# Altium PCB PCB1-IECA-01-21.PcbDoc
Units mm, origin at the board's own origin, x right, y up, seen from the top; angles counter-clockwise.
Board outline 60 x 30 mm, 2 copper layers (Top Layer, Bottom Layer), stack 1.554 mm thick; 23 components, 11 nets, 55 pads, 8 vias.
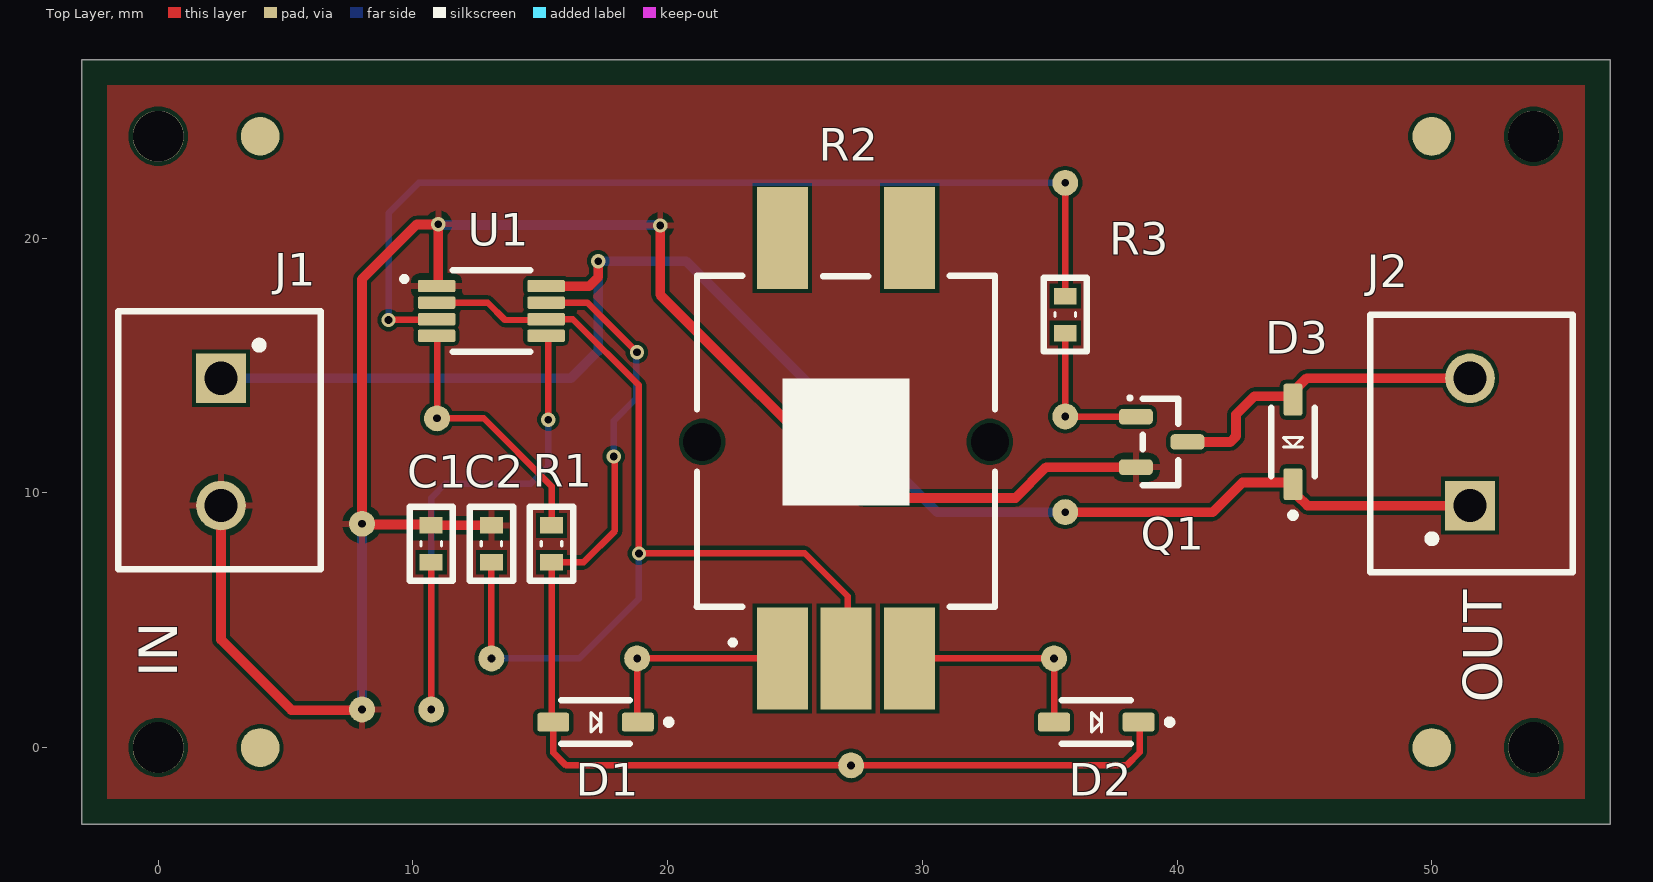
[diagram p0: Top Layer view]
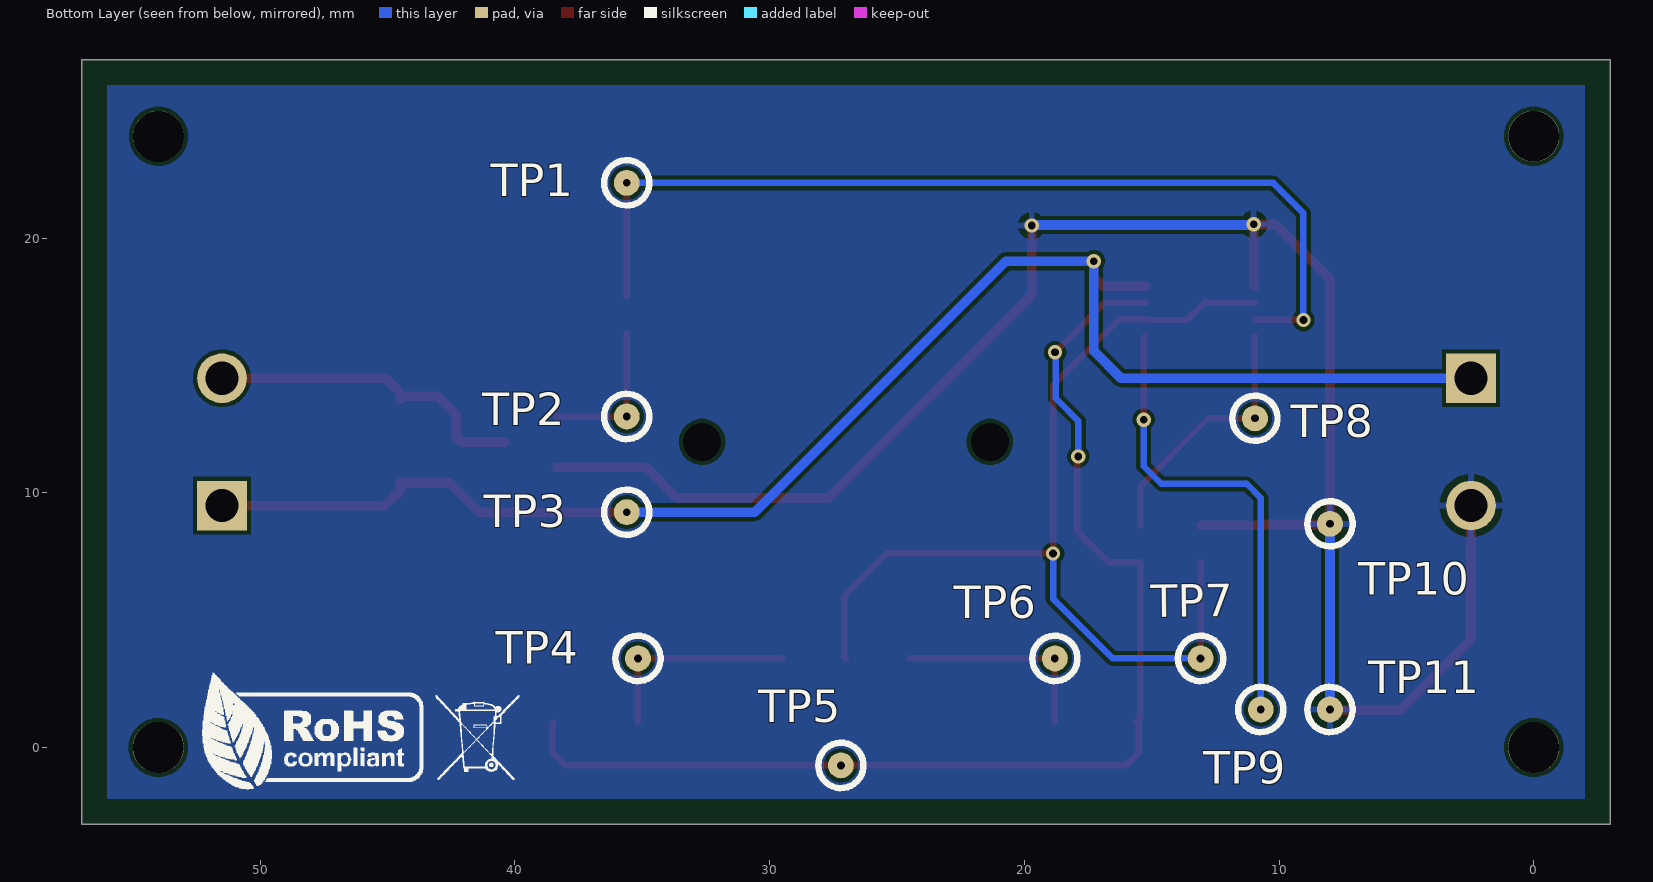
[diagram p1: Bottom Layer view, seen from below]
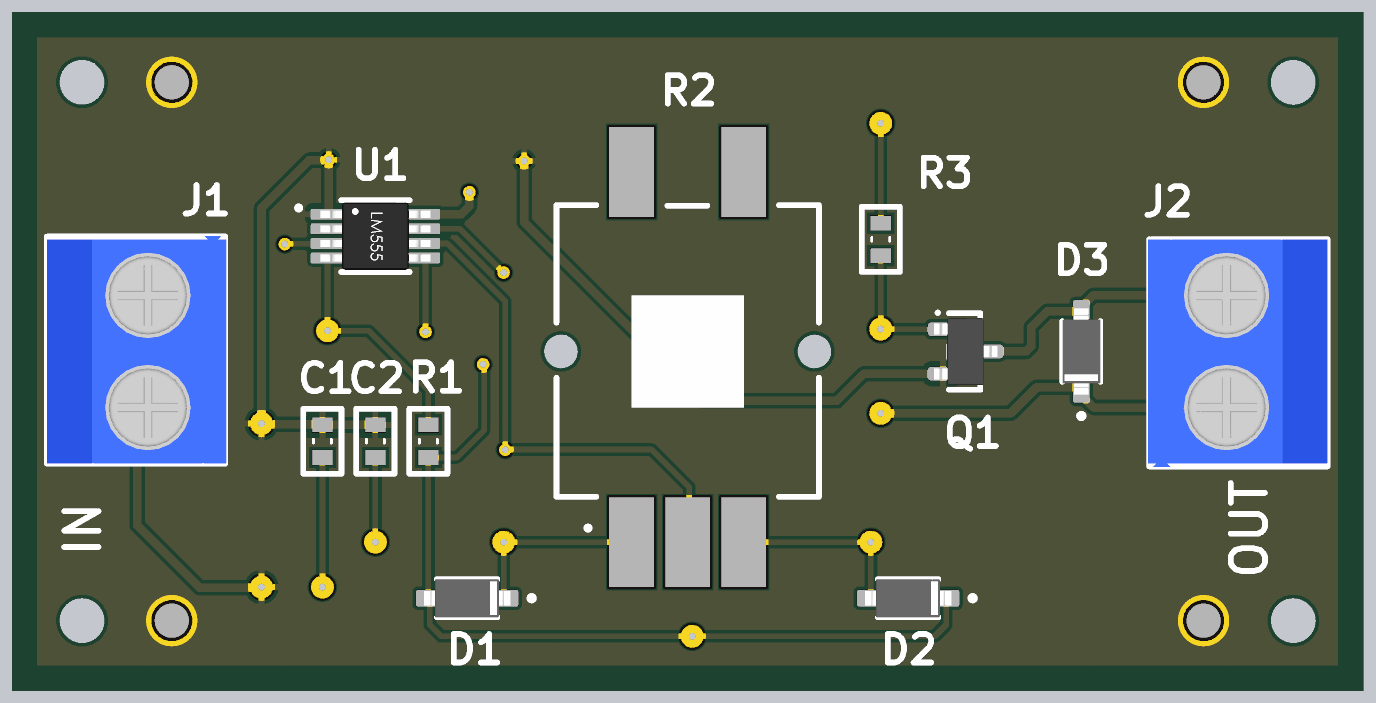
[diagram p2: 3D render of the assembled board from above, using the file's embedded part models]

## Layer stack, top to bottom
Top Solder: solder mask 0.0102, Solder Resist, Dk 3.5
Top Layer: signal copper 0.0356
Dielectric 1: dielectric 1.4834, FR-4, Dk 4.8
Bottom Layer: signal copper 0.0356
Bottom Solder: solder mask 0.0102, Solder Resist, Dk 3.5

## Board outline
-3,-3 -3,27 57,27 57,-3

## Design rules (kind name [scope] priority, off if disabled: settings)
Clearance [All] p1: gap=0.152 ignorepadtopadclearanceinfootprint=FALSE
HoleSize [All] p1: absolutevalues=TRUE maxlimit=2.54 minlimit=0.305 maxpercent=80.000 minpercent=20.000
MinimumSolderMaskSliver [All] p1: minsoldermaskwidth=0.152
PolygonConnect [All] p1: connectstyle=Relief reliefconductorwidth=0.254 reliefentries=4 polygonreliefangle="90 Angle" airgapwidth=0.254
RoutingVias [All] p1: holewidth=0.305 width=0.559 viastyle="Through Hole" minholewidth=0.305 minwidth=0.559 maxholewidth=0.61 maxwidth=0.864
SolderMaskExpansion [All] p1: expansion=0.102 istentingtop=FALSE
Width Width_POWER [InNetClass('POWER')] p1: maxlimit=0.508 minlimit=0.254 preferedwidth=0.381
Width [All] p2: maxlimit=0.305 minlimit=0.152 preferedwidth=0.254
28 further rules are at their usual default settings.

## Classes and differential pairs
net class POWER: GND NetD1_A VCC
component class Sheet1-IECA-01-21: C2 D2 D3 J1 J2 Q1 R1 R2 TP1 TP2 TP3 TP6 TP7 TP10 TP11 U1

## Components (designator, comment, footprint, x,y, rotation, side; value= is the part's Value field where it differs from the comment)
C1 "10000 pF" CAP0603_C0603C103K3HACTU 10.716,8 r90 top (schematic designator C2)
C2 "0.1 µF" CAP0603_C0603C104K3RAC7081 13.078,8 r90 top (schematic designator C1)
D1 "SD103CW-FDIDKR-ND" SD103CW-13-F 17.168,1 r180 top (schematic designator D2)
D2 "SD103CW-FDIDKR-ND" SD103CW-13-F 36.827,1 r180 top (schematic designator D3)
D3 "SD103CW-FDIDKR-ND" SD103CW-13-F 44.549,12 r90 top (schematic designator D1)
J1 "277-1667-ND" TB_2PIN_1935161 2.461,14.5 r270 top
J2 "277-1667-ND" TB_2PIN_1935161 51.5,9.5 r90 top
Q1 "833-MMSS8050-L-TP" SOT23-MMSS8050-L-TP 39.393,12 r0 top
R1 "1 kOhms" RES0603_ERJU03F1001V 15.44,8 r90 top
R2 "50 kΩ" PRS11S-N20F-503B1 27,12 r0 top (schematic designator R3)
R3 "47 Ohms" RES0603_ERJU03F47R0V 35.608,17 r270 top (schematic designator R2)
TP1 "TP" TP 35.608,22.171 r90 bottom (schematic designator TP6)
TP2 "TP" TP 35.608,13 r90 bottom (schematic designator TP7)
TP3 "TP" TP 35.608,9.243 r90 bottom (schematic designator TP2)
TP4 "TP" TP 35.167,3.5 r90 bottom (schematic designator TP5)
TP5 "TP" TP 27.201,-0.7 r90 bottom (schematic designator TP3)
TP6 "TP" TP 18.8,3.5 r90 bottom (schematic designator TP4)
TP7 "TP" TP 13.078,3.5 r90 bottom (schematic designator TP9)
TP8 "TP" TP 10.945,12.926 r90 bottom (schematic designator TP1)
TP9 "TP" TP 10.716,1.495 r90 bottom (schematic designator TP8)
TP10 "TP" TP 8,8.786 r90 bottom
TP11 "TP" TP 8,1.496 r90 bottom
U1 "LM555CMM/NOPBCT-ND" LM555SOP65P490X110-8N 13.078,17.142 r0 top

## Footprints (in the part's own frame and the unit in brackets; to place one, negate y for a bottom-side part, rotate by r counter-clockwise, add the part's x,y. Pads: shape width x height; smd on the part's side, far side on the other; paste and mask are expansions set on the pad)
CAP0603_C0603C103K3HACTU [mm] "CAP CER 10000PF 25V X8R 0603"
  rect 0.65x0.902 smd mask+0.025: 1(-0.725,0) 2(0.725,0)
  silkscreen extent -1.45,-0.85 1.45,0.85, body extent -0.8,-0.4 0.8,0.4, height 0.8
CAP0603_C0603C104K3RAC7081 [mm] "CAP CER 0.1UF 25V X7R 0603"
  rect 0.65x0.902 smd mask+0.025: 1(-0.725,0) 2(0.725,0)
  silkscreen extent -1.45,-0.85 1.45,0.85, body extent -0.8,-0.4 0.8,0.4, height 0.8
LM555SOP65P490X110-8N [mm] "IC OSC SGL TIMER 100KHZ 8VSSOP"
  rrect25% 1.47x0.48 smd mask+0.004: 1(-2.15,0.975) 2(-2.15,0.325) 3(-2.15,-0.325) 4(-2.15,-0.975) 5(2.15,-0.975) 6(2.15,-0.325) 7(2.15,0.325) 8(2.15,0.975)
  silkscreen extent -3.52,-1.6 1.53,1.6, body extent -2.45,-1.5 2.45,1.5, height 1.08
PRS11S-N20F-503B1 [mm] "POT 50K OHM 1/20W CARBON LINEAR"
  rect 2x4 smd mask+0.102: 1(-2.5,-8.5) 2(0,-8.5) 3(2.5,-8.5) 4(-2.5,8) 5(2.5,8)
  round 0 hole 1.5 unplated: S1(-5.65,0) S2(5.65,0)
  silkscreen extent -5.85,-7.97 5.85,6.53, body extent -5.85,-9.53 5.85,8.98, height 20.03
RES0603_ERJU03F47R0V [mm] "RES 47 OHM 1% 1/10W 0603 SMD"
  rect 0.65x0.902 smd mask+0.025: 1(-0.725,0) 2(0.725,0)
  silkscreen extent -1.45,-0.85 1.45,0.85, body extent -0.8,-0.4 0.8,0.4, height 0.46
RES0603_ERJU03F1001V [mm] "RES 1K OHM 1% 1/10W 0603 SMD"
  rect 0.65x0.902 smd mask+0.025: 1(-0.725,0) 2(0.725,0)
  silkscreen extent -1.45,-0.85 1.45,0.85, body extent -0.8,-0.4 0.8,0.4, height 0.46
SD103CW-13-F [mm] "DIODE SCHOTTKY 20V 350MA SOD123"
  rrect25% 1.25x0.74 smd mask+0.025: A(1.66,0) C(-1.66,0)
  silkscreen extent -2.97,-0.85 1.35,0.85, body extent -1.92,-0.85 1.92,0.85, height 1.36
SOT23-MMSS8050-L-TP [mil] "TRANS NPN 25V 1.5A SOT-23"
  rrect50% 52.5x24.02 smd mask+1: 1(-39.89,39) 2(-39.89,-39) 3(39.89,0)
  silkscreen extent -52,-67 26,71, body extent -56,-59 56,59, height 46
TB_2PIN_1935161 [mm] "TERM BLK 2POS SIDE ENTRY 5MM PCB"
  rect 1.95x1.95 hole 1.3: 1(0,0)
  round 1.95 hole 1.3: 2(5,0)
  silkscreen extent -2.63,-4.03 7.5,3.93, body extent -2.65,-4.03 7.5,3.97, height 10
TP [mil]
  round 40 hole 12 mask+4: 1(0,0)
  silkscreen extent -35,-35 35,35

## Part data
C1: library part C0603C103K3HAC7867, "10000 pF ±10% 25V Ceramic Capacitor X8R 0603 (1608 Metric).", Manufacturer=KEMET, Operating Temperature="-55°C ~ 150°C", Package / Case="0603 (1608 Metric)", Supplier Part Number 1=399-C0603C103K3HAC7867CT-ND, Temperature Coefficient=X8R, Tolerance=±10%, Voltage - Rated=25V, Applications="General Purpose", Base Product Number=C0603C, Capacitance="10000 pF", Category="Capacitors Ceramic Capacitors", Mounting Type="Surface Mount, MLCC", Series="SMD Comm X8R HT150C", Size / Dimension="0.063\" L x 0.031\" W (1.60mm x 0.80mm)", Supplier 1=Digi-Key, Thickness (Max)="0.034\" (0.87mm)"
C2: library part C0603C104K3RAC7081, "0.1 µF ±10% 25V Ceramic Capacitor X7R 0603 (1608 Metric).", Manufacturer=KEMET, Operating Temperature="-55°C ~ 125°C", Package / Case="0603 (1608 Metric)", Supplier Part Number 1=399-C0603C104K3RAC7081CT-ND, Temperature Coefficient=X7R, Tolerance=±10%, Voltage - Rated=25V, Applications="Bypass, Decoupling", Base Product Number=C0603C, Capacitance="0.1 µF", Category="Capacitors Ceramic Capacitors", Mounting Type="Surface Mount, MLCC", Series="SMD Comm X7R", Size / Dimension="0.063\" L x 0.031\" W (1.60mm x 0.80mm)", Supplier 1=Digi-Key, Thickness (Max)="0.037\" (0.95mm)"
D1 D2 D3: library part SD103CW-13-F, "Diode Schottky 20 V 350mA (DC) Surface Mount SOD-123.", Capacitance @ Vr, F="28pF @ 0V, 1MHz", Current - Average Rectified (Io)="350mA (DC)", Current - Reverse Leakage @ Vr="5 µA @ 10 V", Manufacturer="Diodes Incorporated", Operating Temperature - Junction="-65°C ~ 125°C", Package / Case=SOD-123, Voltage - DC Reverse (Vr) (Max)="20 V", Voltage - Forward (Vf) (Max) @ If="600 mV @ 200 mA", Category="Discrete Semiconductor Products Diodes - Rectifiers - Single", Diode Type=Schottky, Mounting Type="Surface Mount", Reverse Recovery Time (trr)="10 ns", Speed="Fast Recovery =< 500ns, > 200mA (Io)", Supplier 1=Digi-Key, Supplier Part Number 1=SD103CW-FDIDKR-ND
J1 J2: library part 1935161, "2 Position Wire to Board Terminal Block Horizontal with Board 0.197\" (5.00mm) Through Hole.", Current="18 A", Manufacturer="Phoenix Contact", Voltage="300 V", Category="Connectors, Interconnects", Contact Material=Plating, Housing Material="Polyamide (PA), Nylon", Mating Orientation="Horizontal with Board", Mounting Type="Through Hole", Pitch="0.197\" (5.00mm)", Series="COMBICON PT", Supplier 1=Digi-Key, Supplier Part Number 1=277-1667-ND, Wire Gauge="12-26 AWG"
Q1: library part MMSS8050-L-TP, "Bipolar (BJT) Transistor NPN 25 V 1.5 A 100MHz 625 mW Surface Mount SOT-23.", Current - Collector (Ic) (Max)="1.5 A", Current - Collector Cutoff (Max)=100nA, DC Current Gain (hFE) (Min) @ Ic, Vce="120 @ 100mA, 1V", Frequency - Transition=100MHz, Manufacturer="Micro Commercial Co", Operating Temperature="-55°C ~ 150°C (TJ)", Package / Case="TO-236-3, SC-59, SOT-23-3", Power - Max="625 mW", Voltage - Collector Emitter Breakdown (Max)="25 V", Base Product Number=MMSS8050, Category="Discrete Semiconductor Products Transistors - Bipolar (BJT) - Single", Supplier 1=Mouser, Supplier Part Number 1=833-MMSS8050-L-TP, Transistor Type=NPN, Vce Saturation (Max) @ Ib, Ic="500mV @ 80mA, 800mA"
R1: library part ERJU03F1001V, "1 kOhms ±1% 0.1W, 1/10W Chip Resistor 0603 (1608 Metric) Anti-Sulfur, Automotive AEC-Q200 Thick Film.", Manufacturer="Panasonic Electronic Components", Operating Temperature="-55°C ~ 155°C", Package / Case="0603 (1608 Metric)", Power (Watts)="0.1W, 1/10W", Supplier Part Number 1=10-ERJ-U03F1001VCT-ND, Temperature Coefficient=±100ppm/°C, Tolerance=±1%, Base Product Number=ERJ-U03, Category="Resistors Chip Resistor - Surface Mount", ComponentLink1Description=https://www.digikey.com.mx/en/products/detail/panasonic-electronic-components/ERJ-U03F1001V/11641677?utm_source=snapeda&utm_medium=aggregator&utm_campaign=buynow, Composition="Thick Film", Features="Anti-Sulfur, Automotive AEC-Q200", Height - Seated (Max)="0.022\" (0.55mm)", Resistance="1 kOhms", Series=ERJ-U03, Size / Dimension="0.063\" L x 0.031\" W (1.60mm x 0.80mm)", Supplier 1=Digi-Key
R2: library part PRS11S-N20F-503B1, "50k Ohm 1 Gang Linear Surface Mount Potentiometer None 1.0 Kierros Carbon 0.05W, 1/20W Gull Wing.", Manufacturer="Bourns Inc.", Power (Watts)="0.05W, 1/20W", Resistive Material=Carbon, Supplier Part Number 1=PRS11S-N20F-503B1-ND, Tolerance=±20%, Actuator Diameter="0.236\" (6.00mm)", Actuator Length="0.787\" (20.00mm)", Actuator Type=Flatted, Adjustment Type="Top Adjustment", Base Product Number=PRS11S, Category="Potentiometers, Variable Resistors Rotary Potentiometers, Rheostats", Mounting Type="Surface Mount", Resistance="50 kΩ", Rotation=300°, Series="Pro Audio PRS11S", Size - Body="Rectangular - 0.512\" x 0.461\" Face x 0.283\" H (13.00mm x 11.70mm x 7.20mm)", Supplier 1=Digi-Key, Taper=Linear, Termination Style="Gull Wing"
R3: library part ERJ-U03F47R0V, "47 Ohms ±1% 0.1W, 1/10W Chip Resistor 0603 (1608 Metric) Anti-Sulfur, Automotive AEC-Q200 Thick Film.", Manufacturer="Panasonic Electronic Components", Operating Temperature="-55°C ~ 155°C", Package / Case="0603 (1608 Metric)", Power (Watts)="0.1W, 1/10W", Supplier Part Number 1=10-ERJ-U03F47R0VCT-ND, Temperature Coefficient=±100ppm/°C, Tolerance=±1%, Base Product Number=ERJ-S03, Category="Resistors Chip Resistor - Surface Mount", Composition="Thick Film", Features="Anti-Sulfur, Automotive AEC-Q200", Height - Seated (Max)="0.022\" (0.55mm)", Resistance="47 Ohms", Series=ERJ-S03, Size / Dimension="0.063\" L x 0.031\" W (1.60mm x 0.80mm)", Supplier 1=Digi-Key
U1: library part LM555CMM/NOPB, "555 Type, Timer/Oscillator (Single) IC 100kHz 8-VSSOP.", Current - Supply="10 mA", Frequency=100kHz, Manufacturer="Texas Instruments", Operating Temperature="0°C ~ 70°C", Package / Case="8-TSSOP, 8-MSOP (0.118\", 3.00mm Width)", Voltage - Supply="4.5V ~ 16V", Base Product Number=LM555, Category="Integrated Circuits (ICs) Clock/Timing - Programmable Timers and Oscillators", Manufacturer Product Number=LM555CMM/NOPB, Mounting Type="Surface Mount", Supplier 1=Digi-Key, Supplier Part Number 1=LM555CMM/NOPBCT-ND, Type="555 Type, Timer/Oscillator (Single)"

## Free pads (board coordinates)
  round 1.524 smd mask+0.381: Fiducial(4,0) Fiducial(4,24) Fiducial(49.995,23.997) Fiducial(50,0)
  round 2 hole 2 unplated mask+0: ""(0,0) ""(0,24) ""(53.995,23.997) ""(54,0)

## Via types
v1: diameter 0.559, hole 0.305, Top Layer to Bottom Layer, 8 vias

## Nets (pads, with @x,y where several pads share a name; then routed paths per layer and width w, separated by ;. In a path a pad name is that pad's centre, name@x,y a point inside that pad or via, vN(x,y) a via of type N, cw(c..) or ccw(c..) an arc to the next point about the centre after c; other vN are vias at no path point)
GND: C1.2 C2.2 J1.2 Q1.2 TP10.1 TP11.1 U1.1 | length 74.2
  Top Layer w0.381: J1.2 2.461,4.239 5.23,1.47 7.975,1.47 TP11.1 ; U1.1 10.946,18.117 10.995,18.167 v1(10.995,20.546) 10.983,20.533 10.145,20.533 8,18.389 TP10.1 8.03,8.755 10.686,8.755 C1.2 C2.2 ; v1(19.708,20.495) 19.708,17.777 27.683,9.802 33.652,9.802 34.86,11.009 Q1.2
  Bottom Layer w0.381: TP11.1 TP10.1 ; v1(10.995,20.546) 11.021,20.52 19.682,20.52 v1(19.708,20.495)
NetC1_1: C2.1 R2.2 TP7.1 U1.2 U1.6 | length 39.6
  Top Layer w0.254: U1.2 12.931,17.467 13.612,16.787 15.197,16.787 U1.6 16.273,16.817 18.869,14.221 v1@18.869,7.63 ; TP7.1 C2.1 ; v1(18.869,7.617) v1@18.869,7.63 ; R2.2 27.074,3.574 27.074,5.941 25.385,7.63 v1@18.869,7.63
  Bottom Layer w0.254: TP7.1 16.53,3.5 18.869,5.839 v1(18.869,7.617)
NetC2_1: C1.1 TP9.1 U1.5 | length 24.4
  Top Layer w0.254: TP9.1 C1.1 ; U1.5 15.313,16.082 v1(15.313,12.875)
  Bottom Layer w0.254: TP9.1 10.716,9.802 11.271,10.357 14.624,10.357 15.313,11.046 v1(15.313,12.875)
NetD1_A: D3.A J2.2 Q1.3 | length 12.9
  Top Layer w0.381: Q1.3 42.09,12 42.314,12.223 42.314,13.078 43.025,13.789 44.371,13.789 44.5,13.66 44.5,13.915 45.085,14.5 J2.2
NetD2_A: D1.A D2.C R1.1 TP5.1 U1.7 | length 47
  Top Layer w0.254: U1.7 15.231,17.47 16.84,17.47 v1(18.793,15.517) ; D1.A 15.508,-0.197 16.01,-0.7 TP5.1 38.01,-0.7 38.529,-0.181 38.529,0.958 D2.C ; D1.A@15.609,1 15.44,1.169 R1.1 16.698,7.275 17.93,8.506 17.93,11.376 v1(17.879,11.427)
  Bottom Layer w0.254: v1(17.879,11.427) 17.879,12.824 18.768,13.713 18.768,15.491 v1(18.793,15.517)
NetD2_C: D1.C R2.1 TP6.1 | length 8.2
  Top Layer w0.254: D1.C 18.8,1.028 TP6.1 R2.1
NetD3_A: D2.A R2.3 TP4.1 | length 8.2
  Top Layer w0.254: R2.3 TP4.1 D2.A
NetQ1_1: Q1.1 R3.2 TP2.1 | length 6.1
  Top Layer w0.254: R3.2 TP2.1 35.613,12.995 38.375,12.995 Q1.1
NetR1_2: R1.2 TP8.1 U1.4 | length 10.3
  Top Layer w0.254: TP8.1 U1.4@10.944,16.151 ; TP8.1@10.966,12.926 12.773,12.926 15.44,10.259 R1.2
NetR2_1: R3.1 TP1.1 U1.3 | length 37.6
  Top Layer w0.254: v1(9.04,16.787) 9.055,16.802 10.913,16.802 U1.3 ; R3.1 TP1.1
  Bottom Layer w0.254: v1(9.04,16.787) 9.04,20.978 10.233,22.171 TP1.1
VCC: D3.C J1.1 J2.1 TP3.1 U1.8 | length 61
  Top Layer w0.381: U1.8 16.923,18.117 17.269,18.463 v1(17.269,19.098) ; TP3.1 41.399,9.243 42.568,10.411 44.478,10.411 D3.C ; D3.C@44.5,10.34 44.5,10.085 44.68,9.906 44.705,9.906 45.111,9.5 J2.1
  Bottom Layer w0.381: J1.1 16.202,14.5 17.269,15.567 v1(17.269,19.098) 20.724,19.098 30.579,9.243 TP3.1
pads on no net: R2.4 R2.5 R2.S1 R2.S2

## Polygon pours and split planes (outlines as drawn)
GND on Bottom Layer "GND_L02_P005" (solid, pour order 5): 56,26 -2,26 -2,-2 56,-2
GND on Top Layer "GND_L01_P002" (solid, pour order 2): 56,26 -2,26 -2,-2 56,-2

## Silkscreen, mask and mechanical layers (free items; w line width, h text height)
Top Overlay:
  text "IN" at 0.746,2.754 h1.52 r90
  text "OUT" at 52.746,1.754 h1.52 r90
Bottom Overlay:
  drawing of 18 lines, arcs and shapes, not listed
Mechanical 2:
  the board outline again, w0.254